# Allegro board newBoardCircle_squarechug.brd
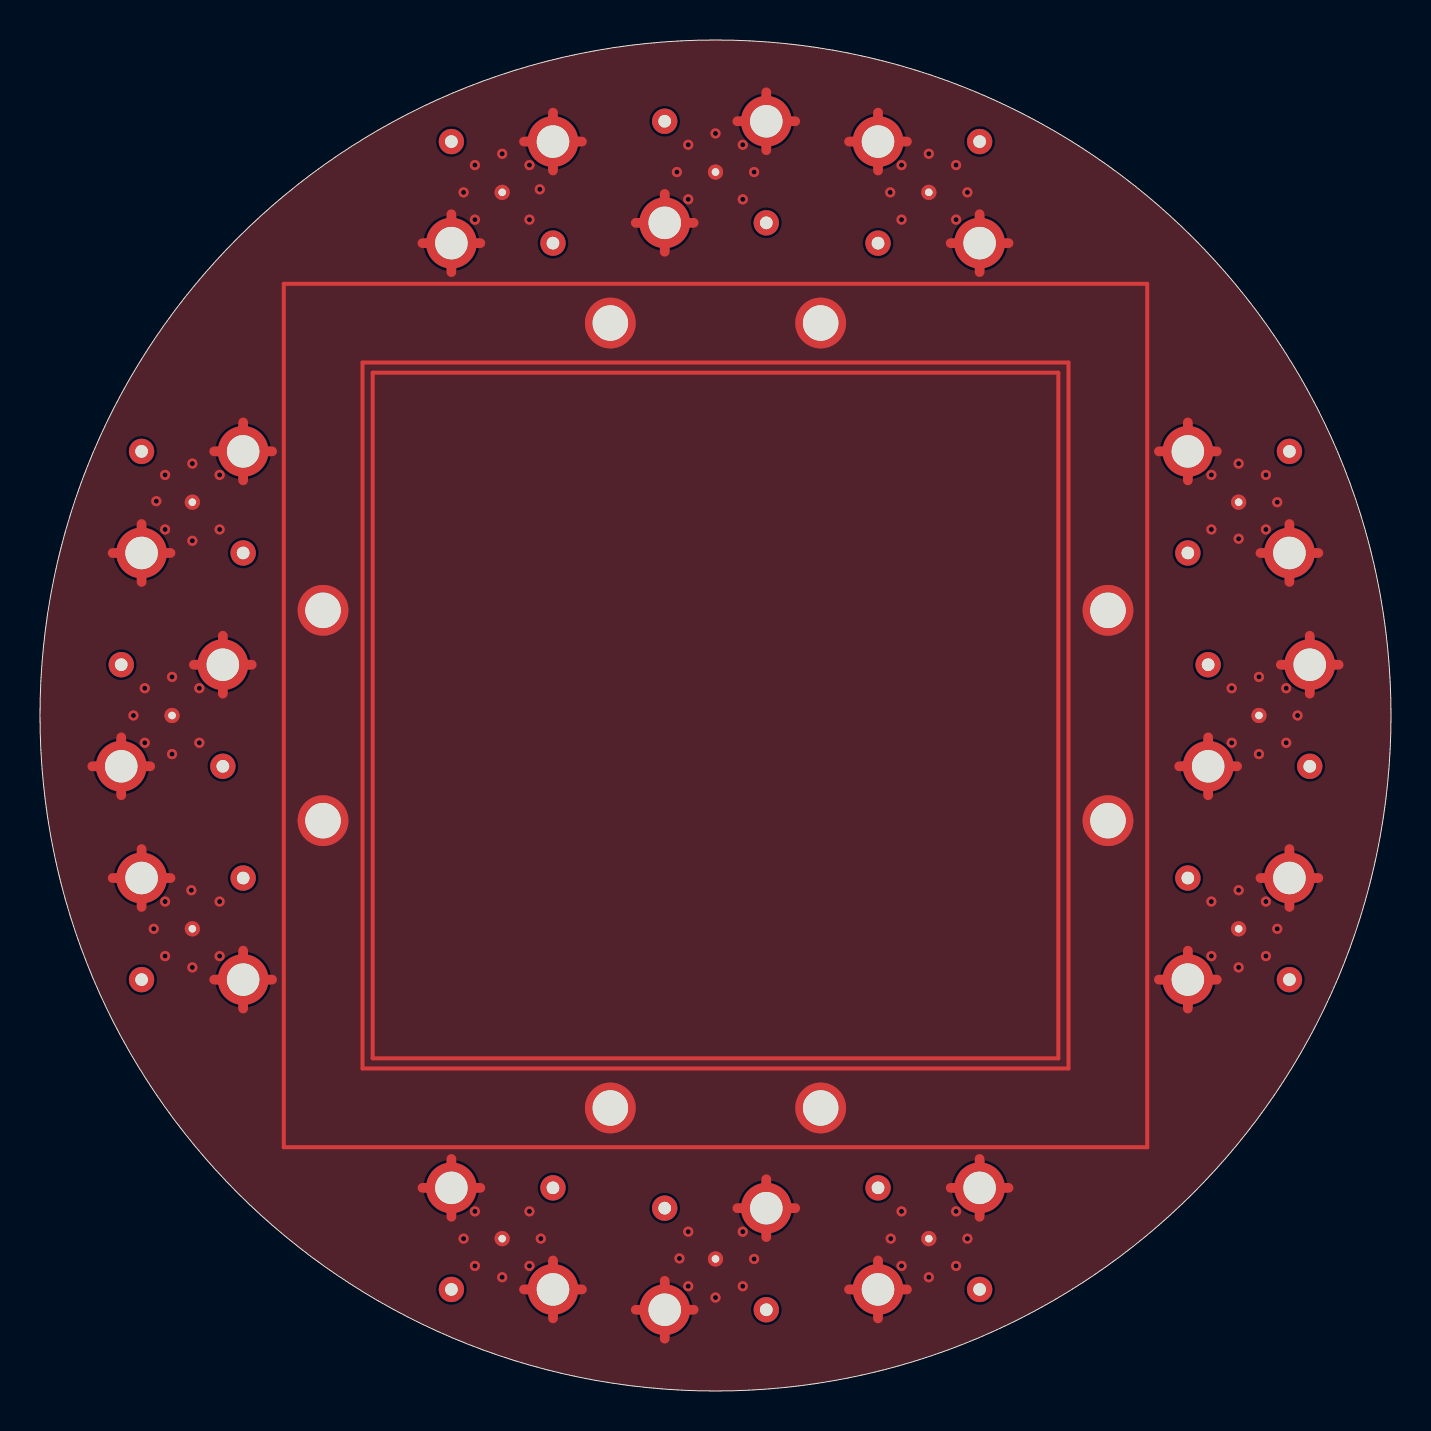
[diagram p0: board, top side]
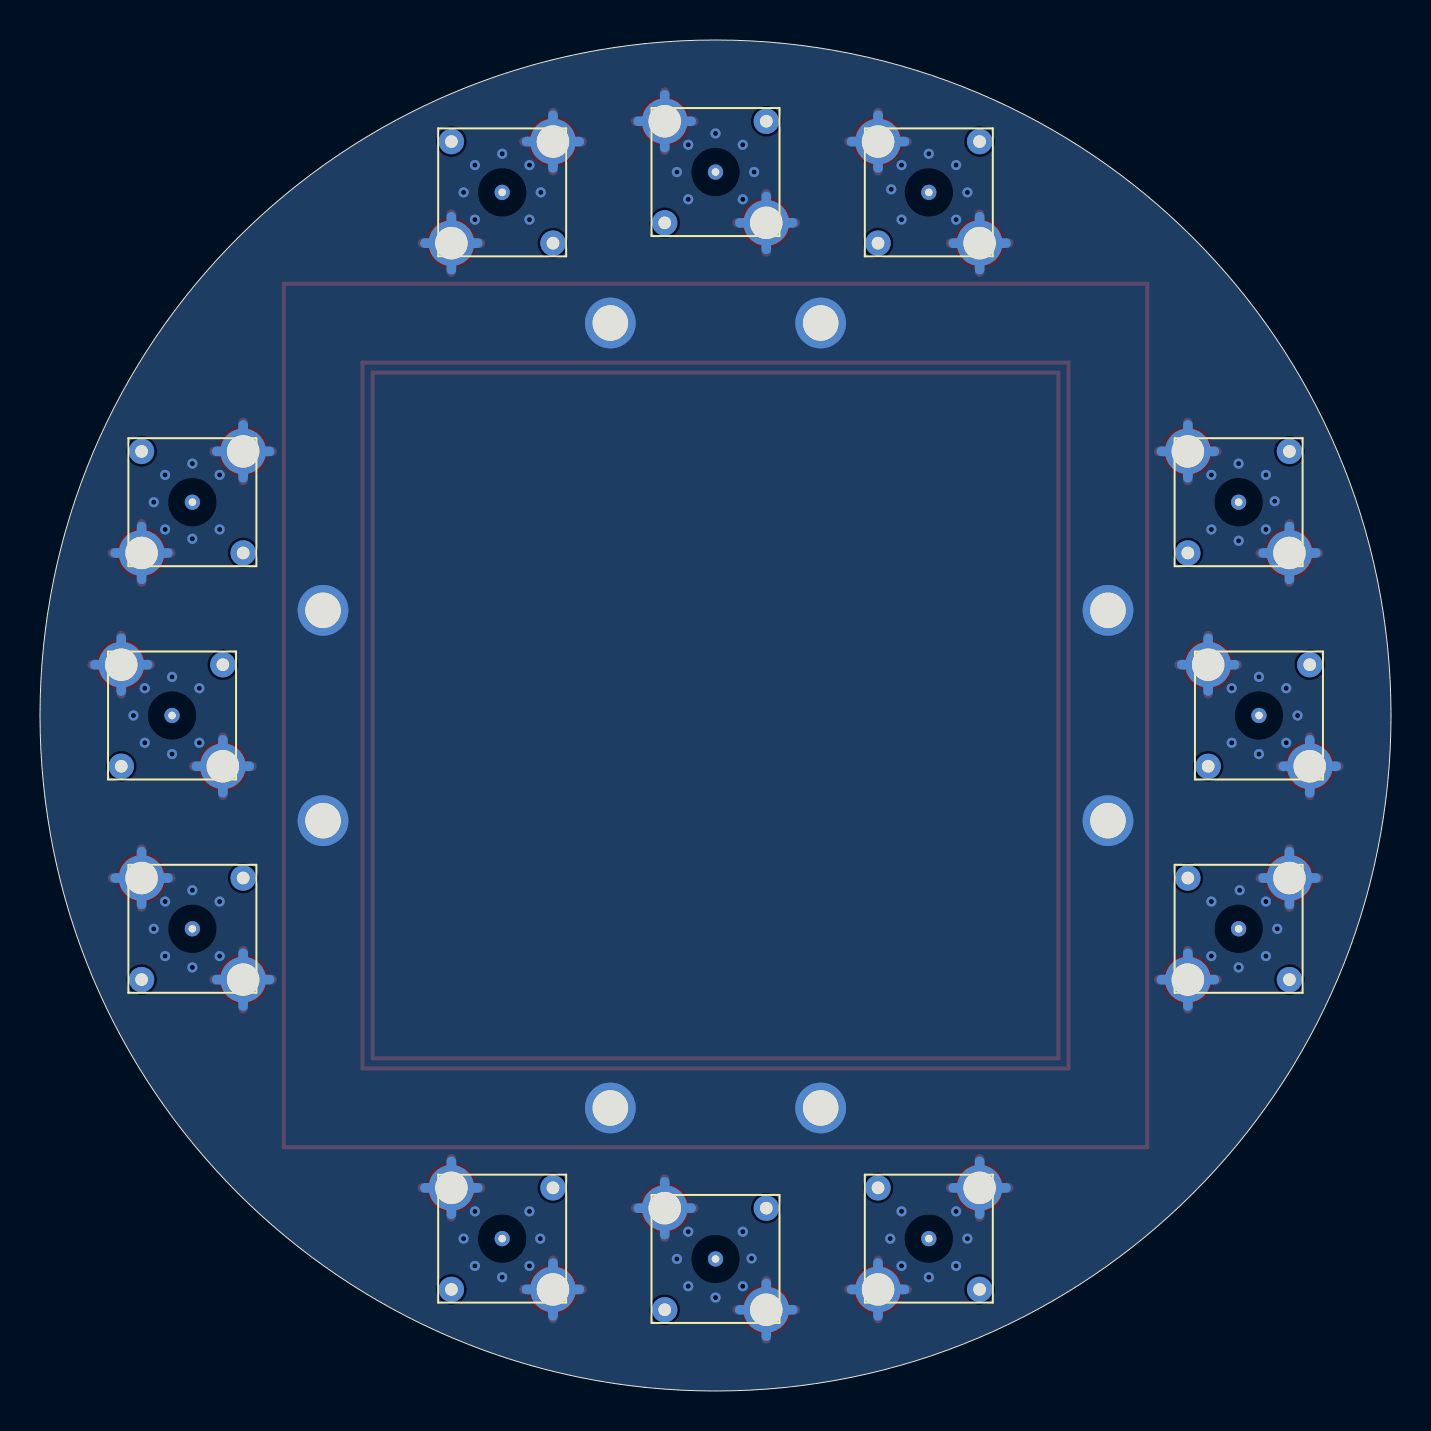
[diagram p1: board, bottom side, seen from below]

Outline 67.56 x 67.56 mm; copper layers: TOP, 02_GND, 03_SIG, BOTTOM. Coordinates in mm from the lower left corner of the outline.
Outline path: circle c33.78,33.78 r33.78

## Placement (name value [footprint] x y rotation side)
J1  -  [SSMA_BB]  60.96 33.78 180 bottom
J2  -  [SSMA_BB]  59.94 44.45 270 bottom
J3  -  [SSMA_BB]  44.45 59.94 270 bottom
J4  -  [SSMA_BB]  33.78 60.96 180 bottom
J5  -  [SSMA_BB]  23.11 59.94 180 bottom
J6  -  [SSMA_BB]  7.62 44.45 180 bottom
J7  -  [SSMA_BB]  6.6 33.78 180 bottom
J8  -  [SSMA_BB]  7.62 23.11 270 bottom
J9  -  [SSMA_BB]  23.11 7.62 270 bottom
J10  -  [SSMA_BB]  33.78 6.6 180 bottom
J11  -  [SSMA_BB]  44.45 7.62 180 bottom
J12  -  [SSMA_BB]  59.94 23.11 180 bottom
MTG1  -  [HOLE070P]  53.41 39.04 0 top
MTG2  -  [HOLE070P]  39.04 53.41 0 top
MTG3  -  [HOLE070P]  28.52 53.41 0 top
MTG4  -  [HOLE070P]  14.15 39.04 0 top
MTG5  -  [HOLE070P]  14.15 28.52 0 top
MTG6  -  [HOLE070P]  28.52 14.15 0 top
MTG7  -  [HOLE070P]  39.04 14.15 0 top
MTG8  -  [HOLE070P]  53.41 28.52 0 top

## Library data of the parts
J1-J12 = SSMA_BB
MTG1-MTG8 = HOLE070P

## Footprints (pads in the part's own frame, mm; a bottom-side part is the same pattern mirrored in y, then rotated)
HOLE070P
  round 2.54 hole 1.778: 1(0,0)
SSMA_BB
  round 1.27 hole 0.635: (-2.54,-2.54) (2.54,2.54)
  round 0.762 hole 0.381: 1(0,0)
  round 2.54 hole 1.626: 2(-2.54,2.54) 3(2.54,-2.54)

## Nets
GND: J1.2(TP-2) J1.3(TP-3) J2.2(TP-2) J2.3(TP-3) J3.2(TP-2) J3.3(TP-3) J4.2(TP-2) J4.3(TP-3) J5.2(TP-2) J5.3(TP-3) J6.2(TP-2) J6.3(TP-3) J7.2(TP-2) J7.3(TP-3) J8.2(TP-2) J8.3(TP-3) J9.2(TP-2) J9.3(TP-3) J10.2(TP-2) J10.3(TP-3) J11.2(TP-2) J11.3(TP-3) J12.2(TP-2) J12.3(TP-3) MTG1.1(TP-1) MTG2.1(TP-1) MTG3.1(TP-1) MTG4.1(TP-1) MTG5.1(TP-1) MTG6.1(TP-1) MTG7.1(TP-1) MTG8.1(TP-1)
MICROWAVE: J1.1(TP-1) J2.1(TP-1) J3.1(TP-1) J4.1(TP-1) J5.1(TP-1) J6.1(TP-1) J7.1(TP-1) J8.1(TP-1) J9.1(TP-1) J10.1(TP-1) J11.1(TP-1) J12.1(TP-1)

## Via types
v1: diameter 0.508, hole 0.254, TOP to BOTTOM, 84 vias

## Routing (per net, layer and track width the routed paths; a pad name or vN(x,y) marks a point on that pad's centre or on a via; arc(x,y) is an arc through that point)
GND: length 392.7
  TOP w0.483: 55.96,46.99 J2.2 ; J2.2 57.4,45.54 ; J2.2 57.4,48.44 ; J2.2 58.85,46.99 ; J11.3 41.91,6.53 ; J11.3 41.91,3.63 ; J11.3 40.46,5.08 ; J11.3 43.36,5.08 ; J1.2 63.5,37.77 ; J1.2 62.05,36.32 ; J1.2 64.95,36.32 ; J1.2 63.5,34.87 ; 5.08,24.21 J8.2 ; J8.2 6.53,25.65 ; J8.2 5.08,27.1 ; J8.2 3.63,25.65 ; J12.2 63.93,25.65 ; J12.2 62.48,24.21 ; J12.2 62.48,27.1 ; J12.2 61.04,25.65 ; J4.2 37.77,63.5 ; J4.2 34.87,63.5 ; J4.2 36.32,64.95 ; J4.2 36.32,62.05 ; 36.32,7.7 J10.2 ; J10.2 34.87,9.14 ; J10.2 36.32,10.59 ; J10.2 37.77,9.14 ; 5.08,40.46 J6.3 ; J6.3 5.08,43.36 ; J6.3 3.63,41.91 ; J6.3 6.53,41.91 ; J7.2 9.14,37.77 ; J7.2 9.14,34.87 ; J7.2 10.59,36.32 ; J7.2 7.7,36.32 ; J7.3 5.51,31.24 ; J7.3 4.06,29.79 ; J7.3 2.62,31.24 ; J7.3 4.06,32.69 ; 10.16,45.54 J6.2 ; J6.2 8.71,46.99 ; J6.2 10.16,48.44 ; J6.2 11.61,46.99 ; J5.2 25.65,63.93 ; J5.2 27.1,62.48 ; J5.2 25.65,61.04 ; J5.2 24.21,62.48 ; J3.3 48.44,57.4 ; J3.3 45.54,57.4 ; J3.3 46.99,58.85 ; J3.3 46.99,55.96 ; J5.3 20.57,58.85 ; J5.3 22.02,57.4 ; J5.3 19.13,57.4 ; J5.3 20.57,55.96 ; J10.3 31.24,5.51 ; J10.3 32.69,4.06 ; J10.3 31.24,2.62 ; J10.3 29.79,4.06 ; 24.21,5.08 J9.3 ; J9.3 25.65,6.53 ; J9.3 25.65,3.63 ; J9.3 27.1,5.08 ; 10.16,19.13 J8.3 ; J8.3 10.16,22.02 ; J8.3 8.71,20.57 ; J8.3 11.61,20.57 ; 31.24,56.97 J4.3 ; J4.3 32.69,58.42 ; J4.3 29.79,58.42 ; J4.3 31.24,59.87 ; J3.2 41.91,63.93 ; J3.2 40.46,62.48 ; J3.2 41.91,61.04 ; J3.2 43.36,62.48 ; 20.57,8.71 J9.2 ; J9.2 19.13,10.16 ; J9.2 22.02,10.16 ; J9.2 20.57,11.61 ; 45.54,10.16 J11.2 ; J11.2 48.44,10.16 ; J11.2 46.99,8.71 ; J11.2 46.99,11.61 ; J1.3 58.42,32.69 ; J1.3 56.97,31.24 ; J1.3 59.87,31.24 ; J1.3 58.42,29.79 ; J12.3 57.4,22.02 ; J12.3 55.96,20.57 ; J12.3 58.85,20.57 ; J12.3 57.4,19.13 ; J2.3 63.93,41.91 ; J2.3 61.04,41.91 ; J2.3 62.48,40.46 ; J2.3 62.48,43.36
  03_SIG w0.483: 36.32,62.18 J4.2 ; J4.2 37.64,63.5 ; J4.2 36.32,64.82 ; J4.2 35,63.5 ; J3.2 43.23,62.48 ; J3.2 40.59,62.48 ; J3.2 41.91,63.81 ; J3.2 41.91,61.16 ; 57.4,19.25 J12.3 ; J12.3 56.08,20.57 ; J12.3 57.4,21.9 ; J12.3 58.73,20.57 ; J8.3 11.48,20.57 ; J8.3 10.16,21.9 ; J8.3 8.84,20.57 ; J8.3 10.16,19.25 ; 25.65,3.76 J9.3 ; J9.3 24.33,5.08 ; J9.3 25.65,6.4 ; J9.3 26.98,5.08 ; J6.2 11.48,46.99 ; J6.2 10.16,45.67 ; J6.2 8.84,46.99 ; J6.2 10.16,48.31 ; 63.5,35 J1.2 ; J1.2 64.82,36.32 ; J1.2 63.5,37.64 ; J1.2 62.18,36.32 ; J10.3 31.24,5.39 ; J10.3 31.24,2.74 ; J10.3 29.92,4.06 ; J10.3 32.56,4.06 ; 35,9.14 J10.2 ; J10.2 36.32,10.47 ; J10.2 37.64,9.14 ; J10.2 36.32,7.82 ; J3.3 46.99,58.73 ; J3.3 48.31,57.4 ; J3.3 45.67,57.4 ; J3.3 46.99,56.08 ; J7.3 5.39,31.24 ; J7.3 2.74,31.24 ; J7.3 4.06,32.56 ; J7.3 4.06,29.92 ; J12.2 63.81,25.65 ; J12.2 62.48,26.98 ; J12.2 61.16,25.65 ; J12.2 62.48,24.33 ; J8.2 5.08,26.98 ; J8.2 6.4,25.65 ; J8.2 5.08,24.33 ; J8.2 3.76,25.65 ; 20.57,8.84 J9.2 ; J9.2 20.57,11.48 ; J9.2 19.25,10.16 ; J9.2 21.9,10.16 ; 25.65,61.16 J5.2 ; J5.2 24.33,62.48 ; J5.2 25.65,63.81 ; J5.2 26.98,62.48 ; 62.48,40.59 J2.3 ; J2.3 62.48,43.23 ; J2.3 61.16,41.91 ; J2.3 63.81,41.91 ; J11.2 46.99,11.48 ; J11.2 48.31,10.16 ; J11.2 46.99,8.84 ; J11.2 45.67,10.16 ; J7.2 10.47,36.32 ; J7.2 9.14,37.64 ; J7.2 7.82,36.32 ; J7.2 9.14,35 ; J6.3 6.4,41.91 ; J6.3 5.08,40.59 ; J6.3 5.08,43.23 ; J6.3 3.76,41.91 ; 57.4,45.67 J2.2 ; J2.2 58.73,46.99 ; J2.2 57.4,48.31 ; J2.2 56.08,46.99 ; 40.59,5.08 J11.3 ; J11.3 41.91,6.4 ; J11.3 43.23,5.08 ; J11.3 41.91,3.76 ; 58.42,29.92 J1.3 ; J1.3 59.74,31.24 ; J1.3 57.1,31.24 ; J1.3 58.42,32.56 ; 19.25,57.4 J5.3 ; J5.3 21.9,57.4 ; J5.3 20.57,58.73 ; J5.3 20.57,56.08 ; J4.3 32.56,58.42 ; J4.3 31.24,57.1 ; J4.3 29.92,58.42 ; J4.3 31.24,59.74
  BOTTOM w0.483: J10.3 32.56,4.06 ; J10.3 31.24,5.39 ; J10.3 31.24,2.74 ; J10.3 29.92,4.06 ; 5.08,24.33 J8.2 ; J8.2 6.4,25.65 ; J8.2 3.76,25.65 ; J8.2 5.08,26.98 ; J3.2 43.23,62.48 ; J3.2 41.91,63.81 ; J3.2 41.91,61.16 ; J3.2 40.59,62.48 ; 62.48,24.33 J12.2 ; J12.2 62.48,26.98 ; J12.2 63.81,25.65 ; J12.2 61.16,25.65 ; J1.3 59.74,31.24 ; J1.3 58.42,32.56 ; J1.3 58.42,29.92 ; J1.3 57.1,31.24 ; J5.2 25.65,63.81 ; J5.2 25.65,61.16 ; J5.2 26.98,62.48 ; J5.2 24.33,62.48 ; 9.14,35 J7.2 ; J7.2 9.14,37.64 ; J7.2 7.82,36.32 ; J7.2 10.47,36.32 ; 56.08,46.99 J2.2 ; J2.2 57.4,45.67 ; J2.2 58.73,46.99 ; J2.2 57.4,48.31 ; J6.2 10.16,48.31 ; J6.2 11.48,46.99 ; J6.2 8.84,46.99 ; J6.2 10.16,45.67 ; J1.2 63.5,37.64 ; J1.2 63.5,35 ; J1.2 64.82,36.32 ; J1.2 62.18,36.32 ; J9.2 20.57,11.48 ; J9.2 20.57,8.84 ; J9.2 21.9,10.16 ; J9.2 19.25,10.16 ; 5.08,40.59 J6.3 ; J6.3 3.76,41.91 ; J6.3 5.08,43.23 ; J6.3 6.4,41.91 ; 41.91,3.76 J11.3 ; J11.3 40.59,5.08 ; J11.3 41.91,6.4 ; J11.3 43.23,5.08 ; 31.24,57.1 J4.3 ; J4.3 29.92,58.42 ; J4.3 32.56,58.42 ; J4.3 31.24,59.74 ; J3.3 46.99,58.73 ; J3.3 48.31,57.4 ; J3.3 46.99,56.08 ; J3.3 45.67,57.4 ; 56.08,20.57 J12.3 ; J12.3 58.73,20.57 ; J12.3 57.4,19.25 ; J12.3 57.4,21.9 ; J11.2 46.99,11.48 ; J11.2 45.67,10.16 ; J11.2 48.31,10.16 ; J11.2 46.99,8.84 ; 36.32,62.18 J4.2 ; J4.2 35,63.5 ; J4.2 37.64,63.5 ; J4.2 36.32,64.82 ; J9.3 26.98,5.08 ; J9.3 24.33,5.08 ; J9.3 25.65,3.76 ; J9.3 25.65,6.4 ; J2.3 63.81,41.91 ; J2.3 62.48,43.23 ; J2.3 62.48,40.59 ; J2.3 61.16,41.91 ; J8.3 10.16,21.9 ; J8.3 8.84,20.57 ; J8.3 11.48,20.57 ; J8.3 10.16,19.25 ; 2.74,31.24 J7.3 ; J7.3 5.39,31.24 ; J7.3 4.06,32.56 ; J7.3 4.06,29.92 ; J10.2 36.32,10.47 ; J10.2 35,9.14 ; J10.2 37.64,9.14 ; J10.2 36.32,7.82 ; 19.25,57.4 J5.3 ; J5.3 20.57,56.08 ; J5.3 20.57,58.73 ; J5.3 21.9,57.4
  vias: v1(4.67,33.78) v1(5.24,35.15) v1(5.24,32.42) v1(5.69,23.11) v1(5.82,44.5) v1(6.26,45.81) v1(6.26,43.09) v1(6.26,24.48) v1(6.26,21.75) v1(6.6,35.71) v1(6.6,31.85) v1(7.62,46.38) v1(7.62,42.52) v1(7.57,25.04) v1(7.62,21.18) v1(7.97,35.15) v1(7.97,32.42) v1(8.98,45.81) v1(8.98,43.09) v1(8.98,24.48) v1(8.98,21.75) v1(21.18,59.94) v1(21.18,7.62) v1(21.75,61.31) v1(21.75,58.58) v1(21.75,8.98) v1(21.75,6.26) v1(23.11,61.87) v1(23.11,5.69) v1(24.48,61.31) v1(24.48,58.58) v1(24.48,8.98) v1(24.48,6.26) v1(24.99,60.1) v1(25.04,7.62) v1(31.85,60.96) v1(31.98,6.63) v1(32.42,62.32) v1(32.42,59.6) v1(32.42,7.97) v1(32.42,5.24) v1(33.78,62.89) v1(33.78,4.67) v1(35.15,62.32) v1(35.15,59.6) v1(35.15,7.97) v1(35.15,5.24) v1(35.71,60.96) v1(35.71,6.6) v1(42.52,59.94) v1(42.54,7.62) v1(43.09,61.31) v1(43.09,58.58) v1(43.09,8.98) v1(43.09,6.26) v1(44.45,61.87) v1(44.45,5.69) v1(45.81,61.31) v1(45.81,58.58) v1(45.81,8.98) v1(45.81,6.26) v1(46.38,59.94) v1(46.38,7.62) v1(58.58,45.81) v1(58.58,43.09) v1(58.58,24.48) v1(58.58,21.75) v1(59.6,35.15) v1(59.6,32.42) v1(59.94,46.38) v1(59.94,42.62) v1(59.94,25.04) v1(59.94,21.18) v1(60.96,35.71) v1(60.96,31.85) v1(61.31,45.81) v1(61.31,43.09) v1(61.31,24.48) v1(61.31,21.75) v1(61.87,44.45) v1(61.87,23.11) v1(62.32,35.15) v1(62.32,32.42) v1(62.89,33.78)

## Copper pours and planes (outline as drawn; the poured copper is in the pictures)
GND on TOP, BOTTOM, 02_GND, 03_SIG: 0,33.78 67.56,33.78
